# Altium PCB DPT2.0.PcbDoc (part 1 of 2)
Units mm, origin at the board's own origin, x right, y up, seen from the top; angles counter-clockwise.
Board outline 109.22 x 132.08 mm, 4 copper layers (Top Layer, Layer 1, Layer 2, Bottom Layer), stack 1.491 mm thick; 260 components, 74 nets, 572 pads, 330 vias.
Unrouted connection lines stored in the file: 54.
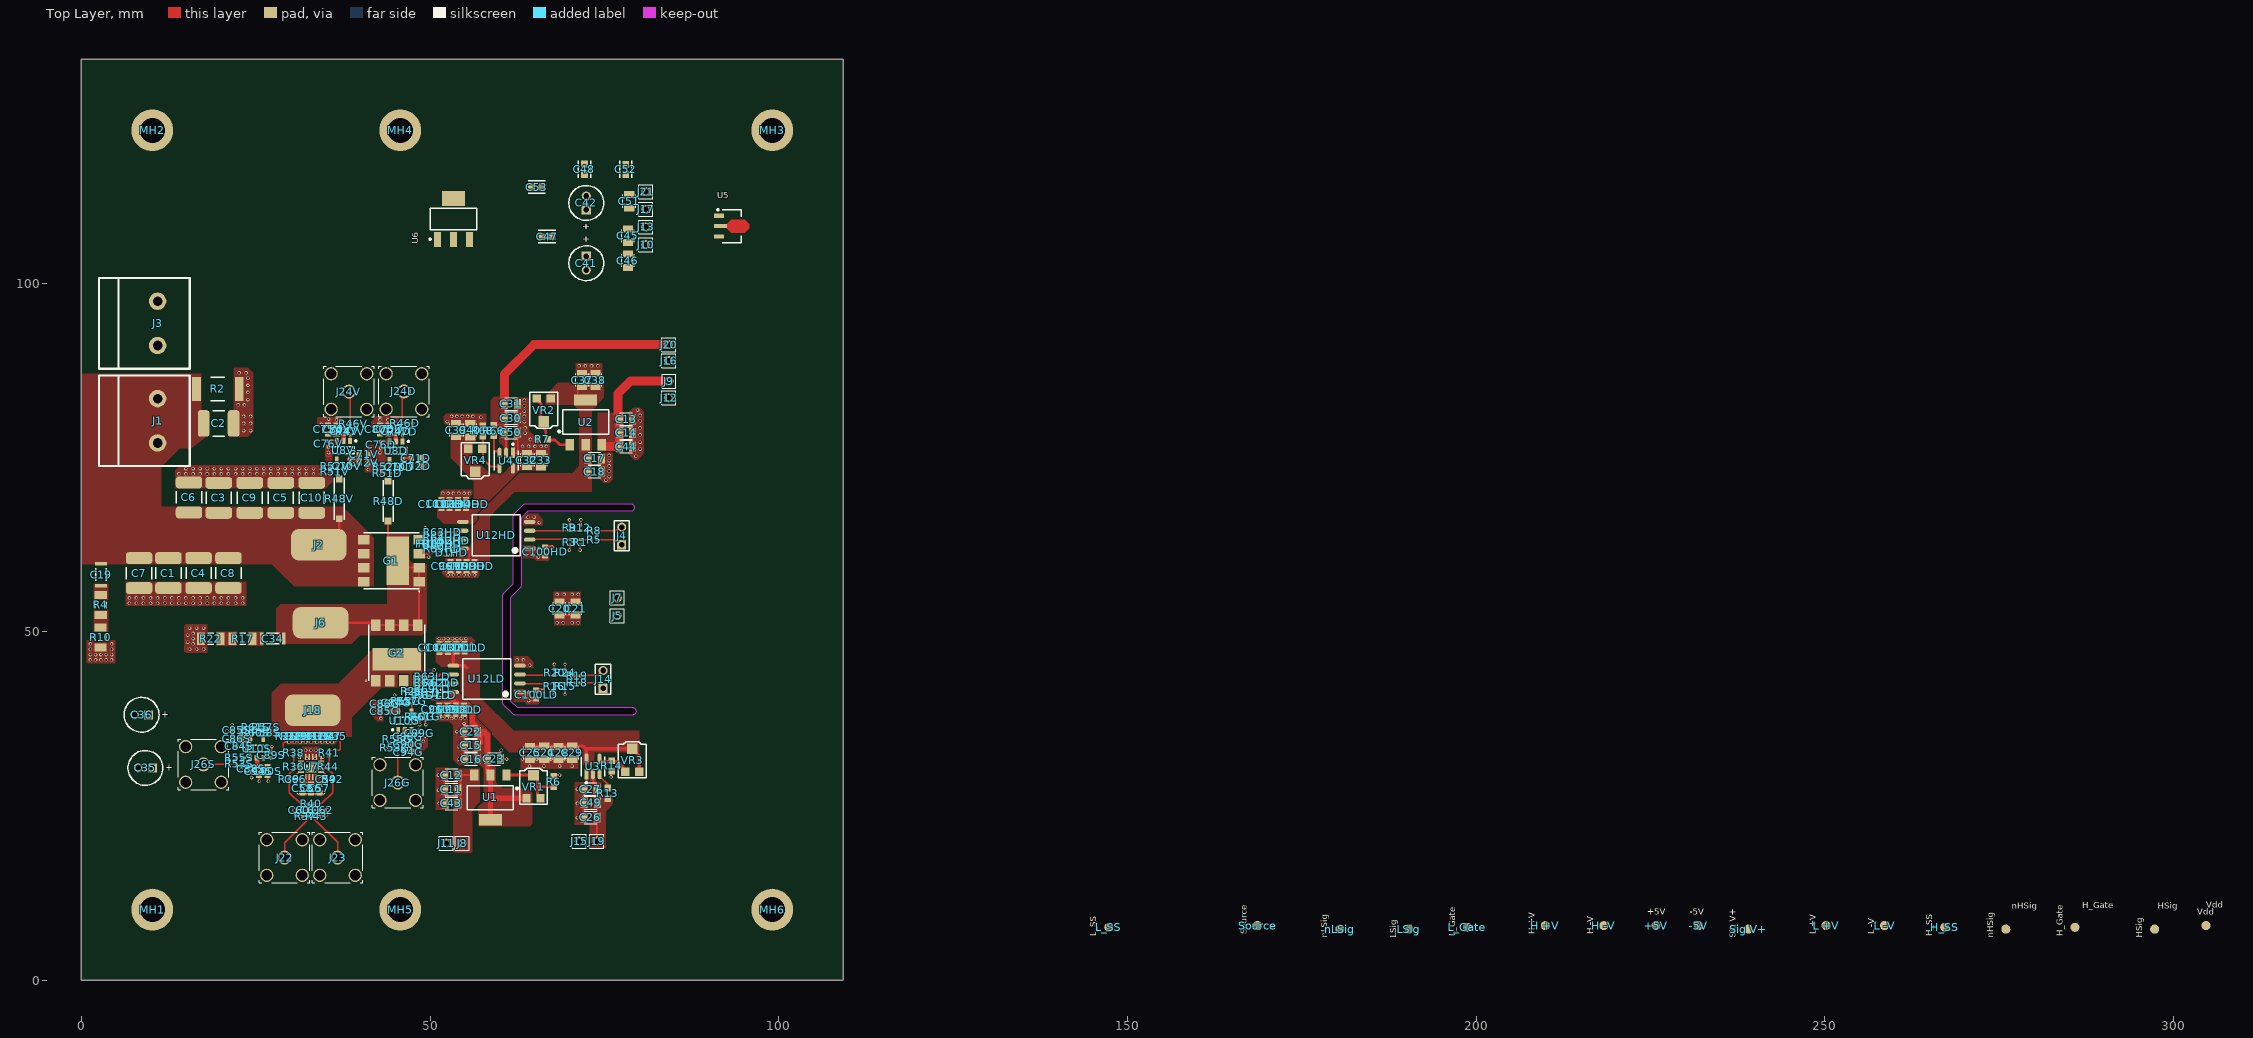
[diagram p0: Top Layer view]
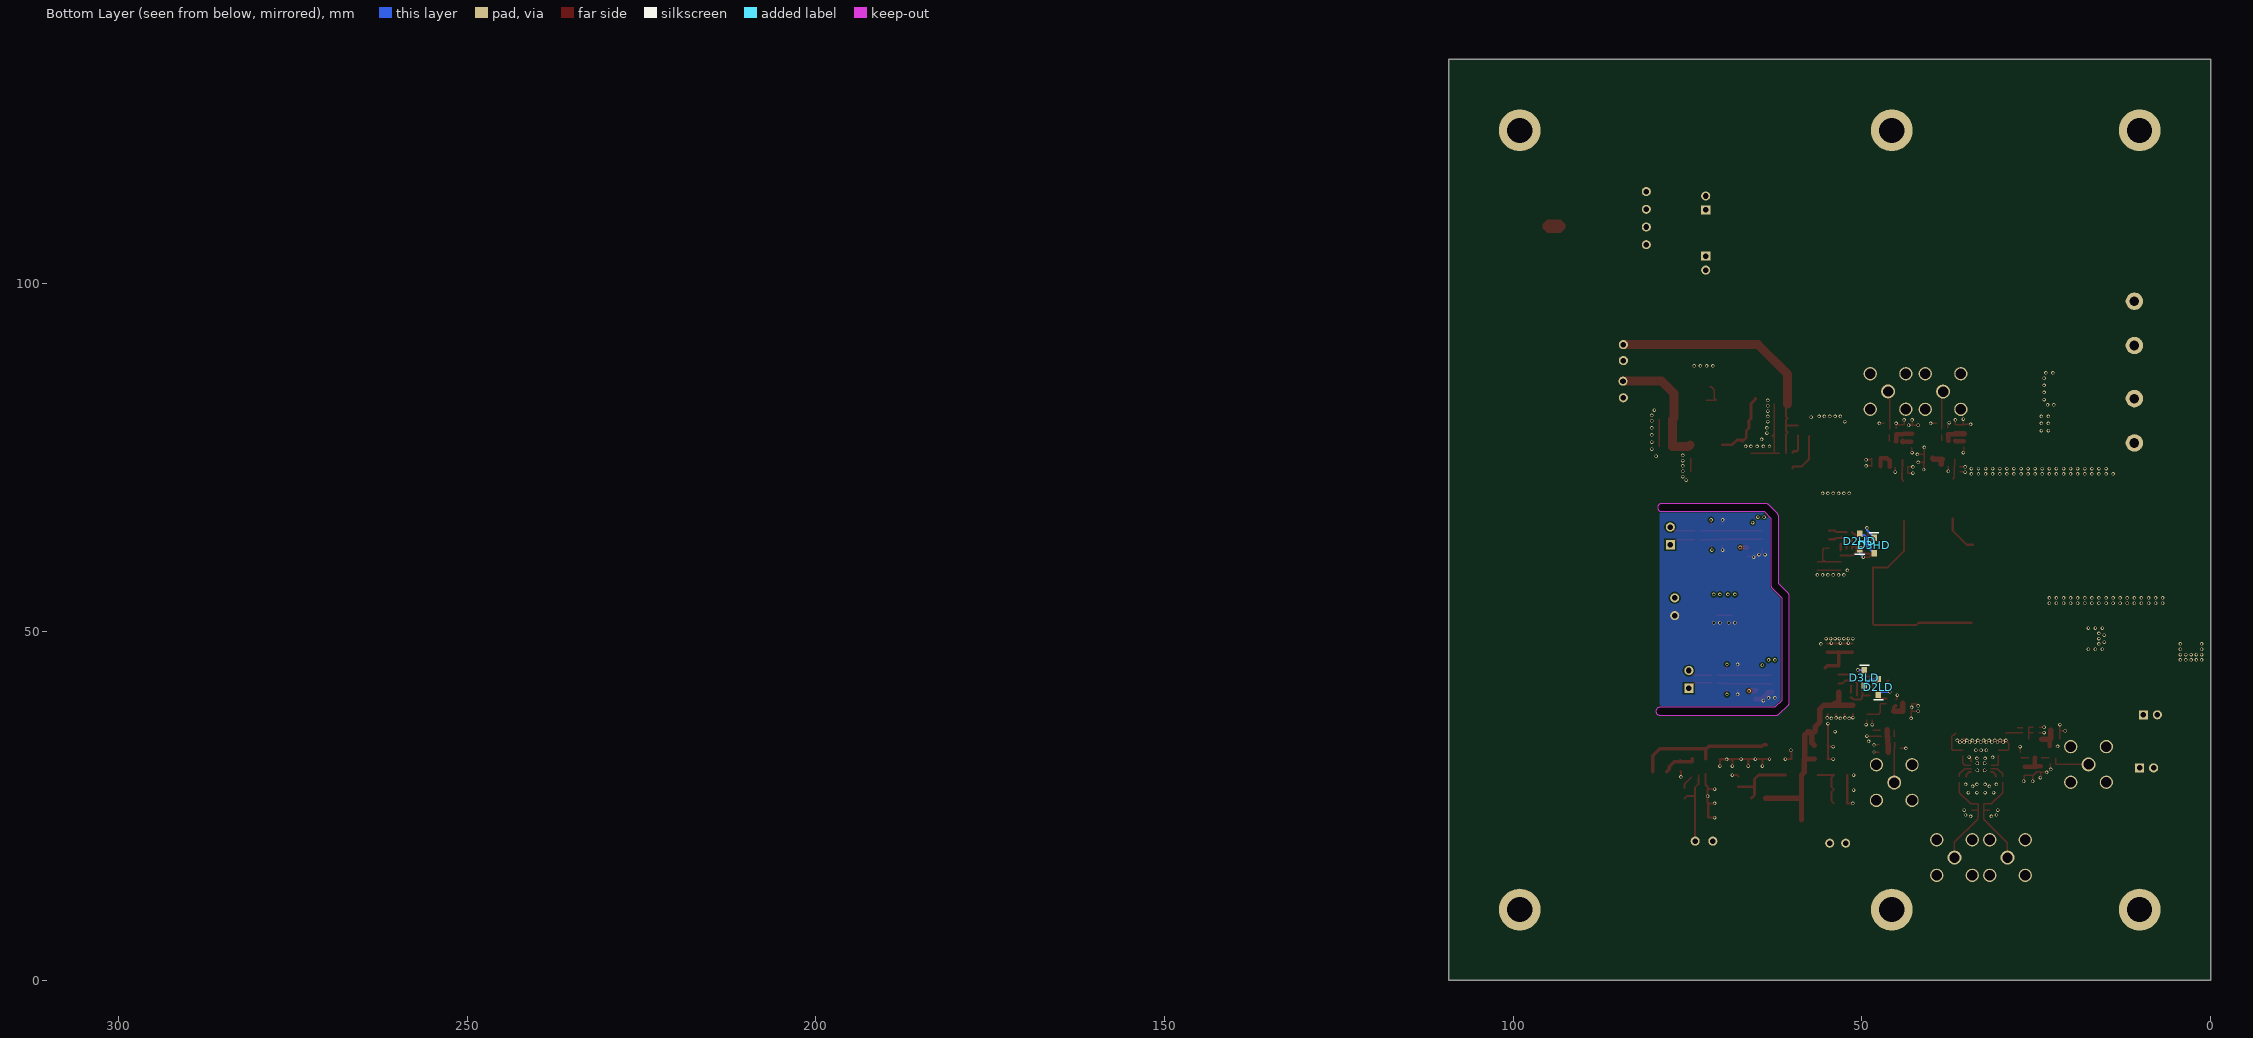
[diagram p1: Bottom Layer view, seen from below]
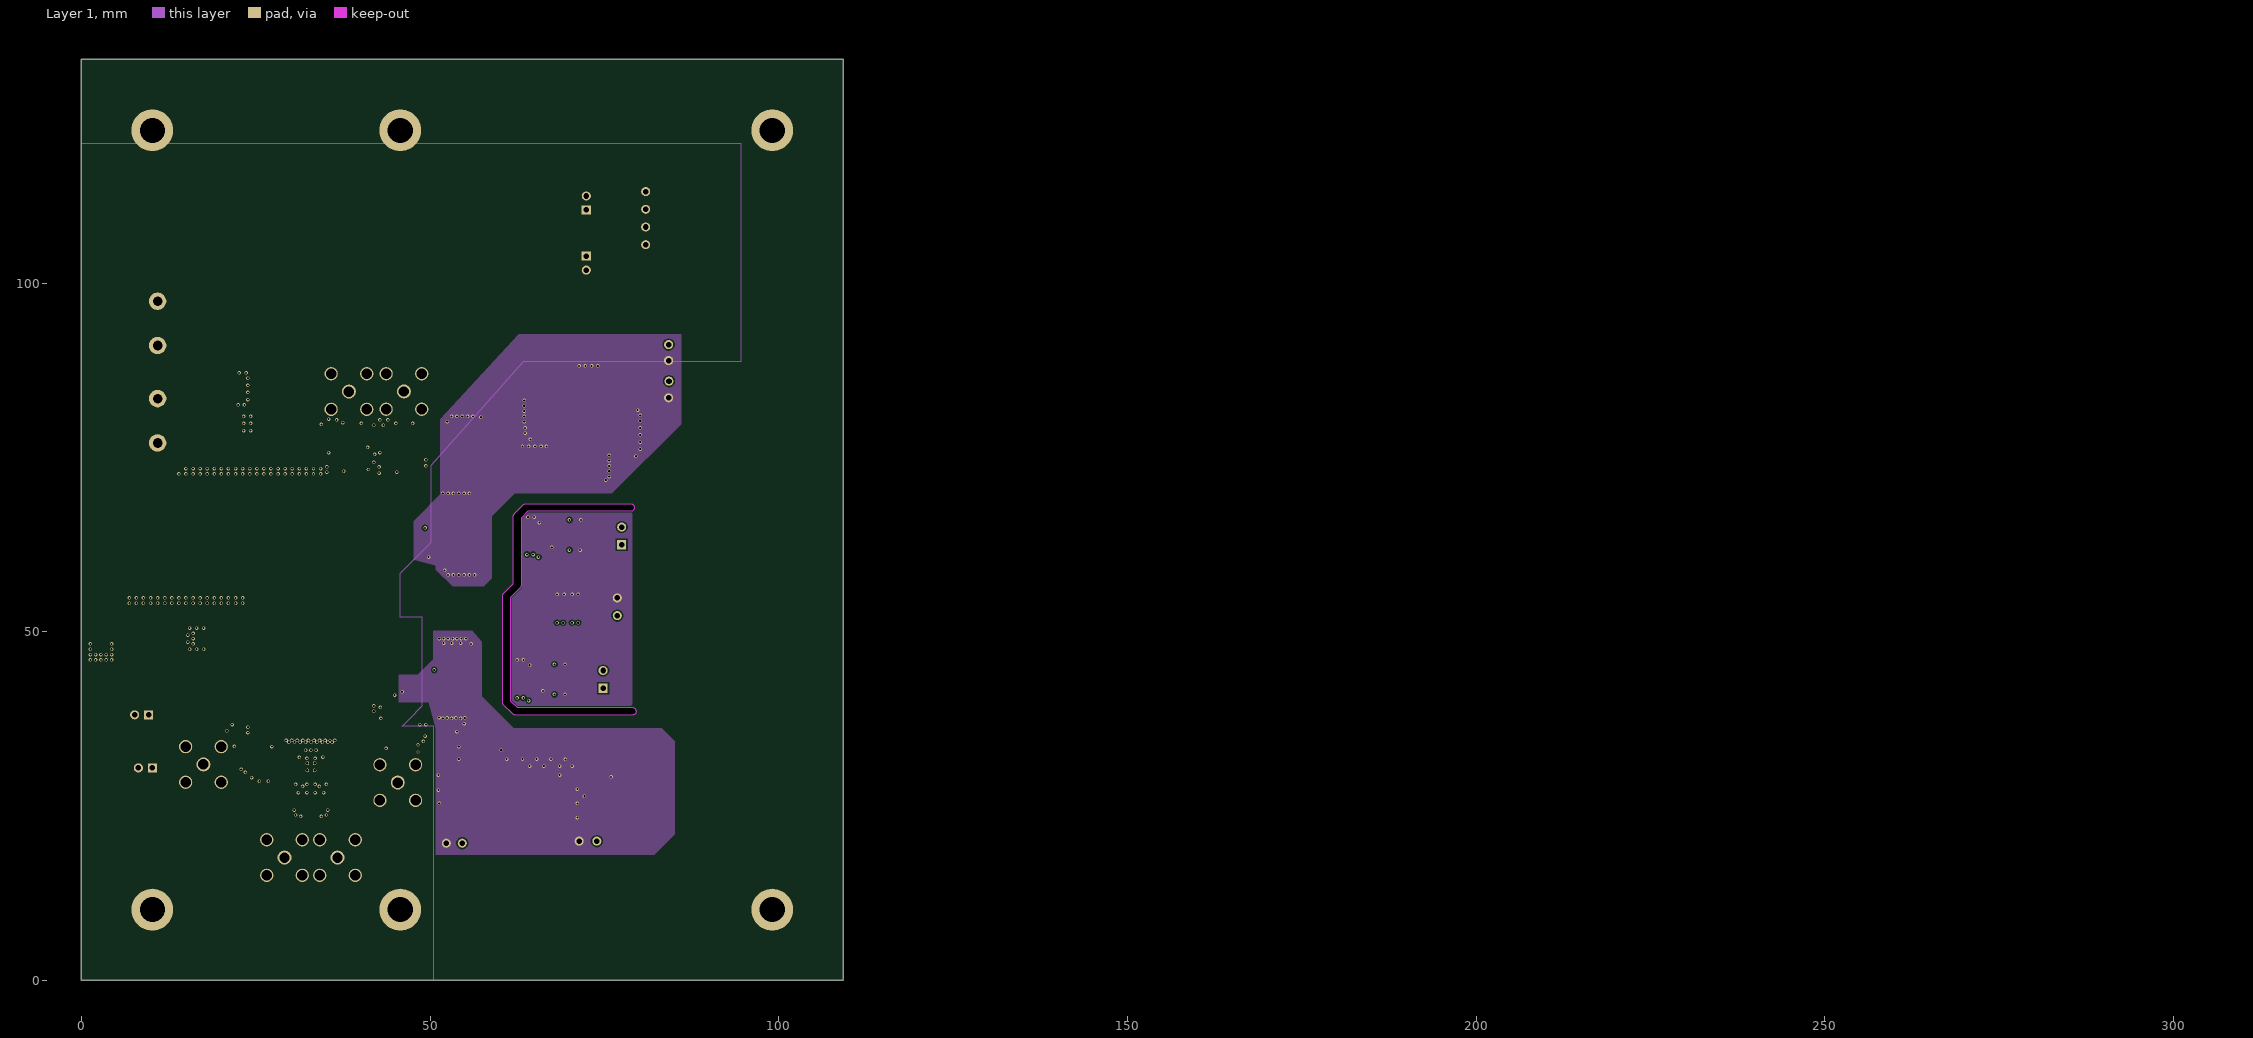
[diagram p2: Layer 1]
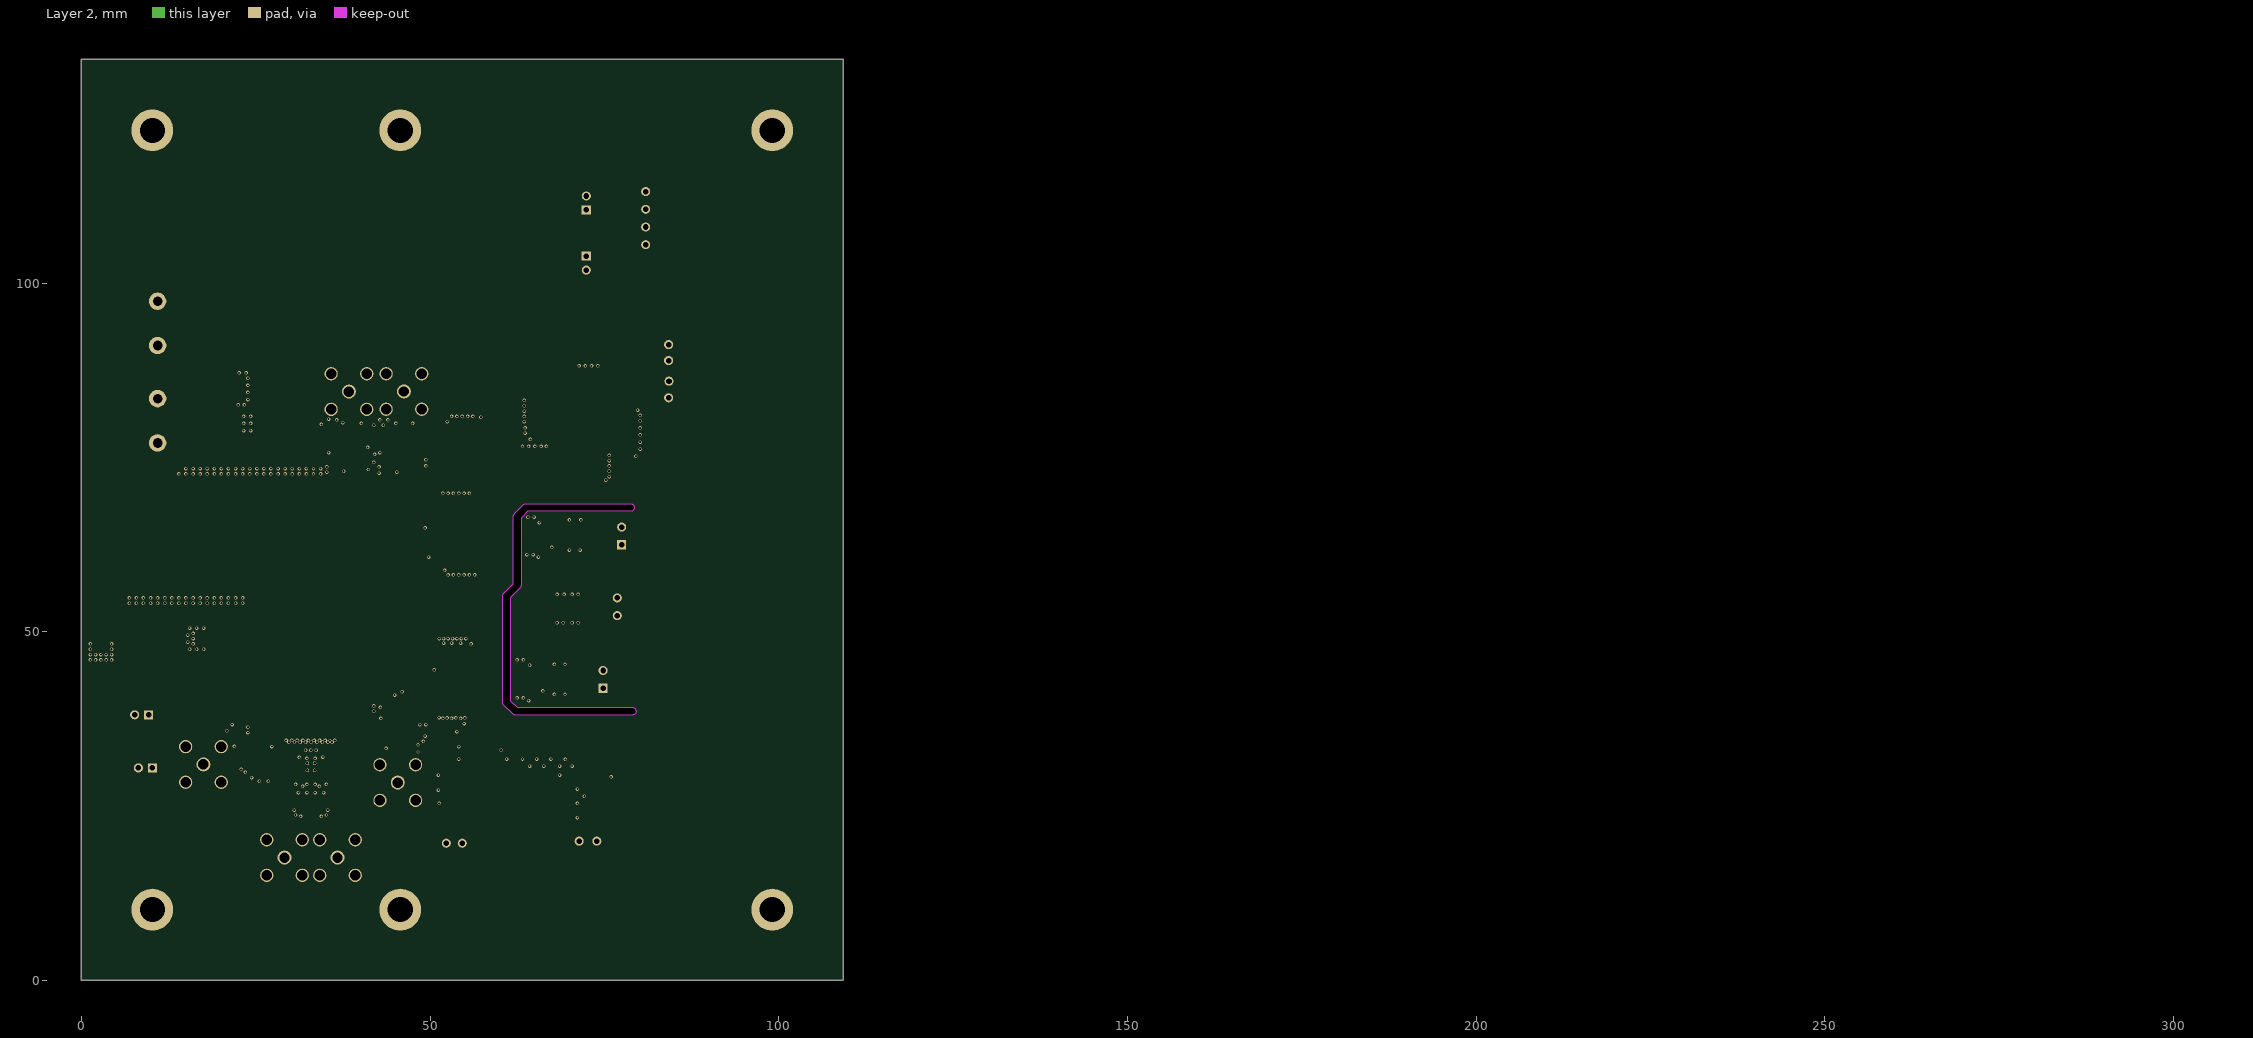
[diagram p3: Layer 2]
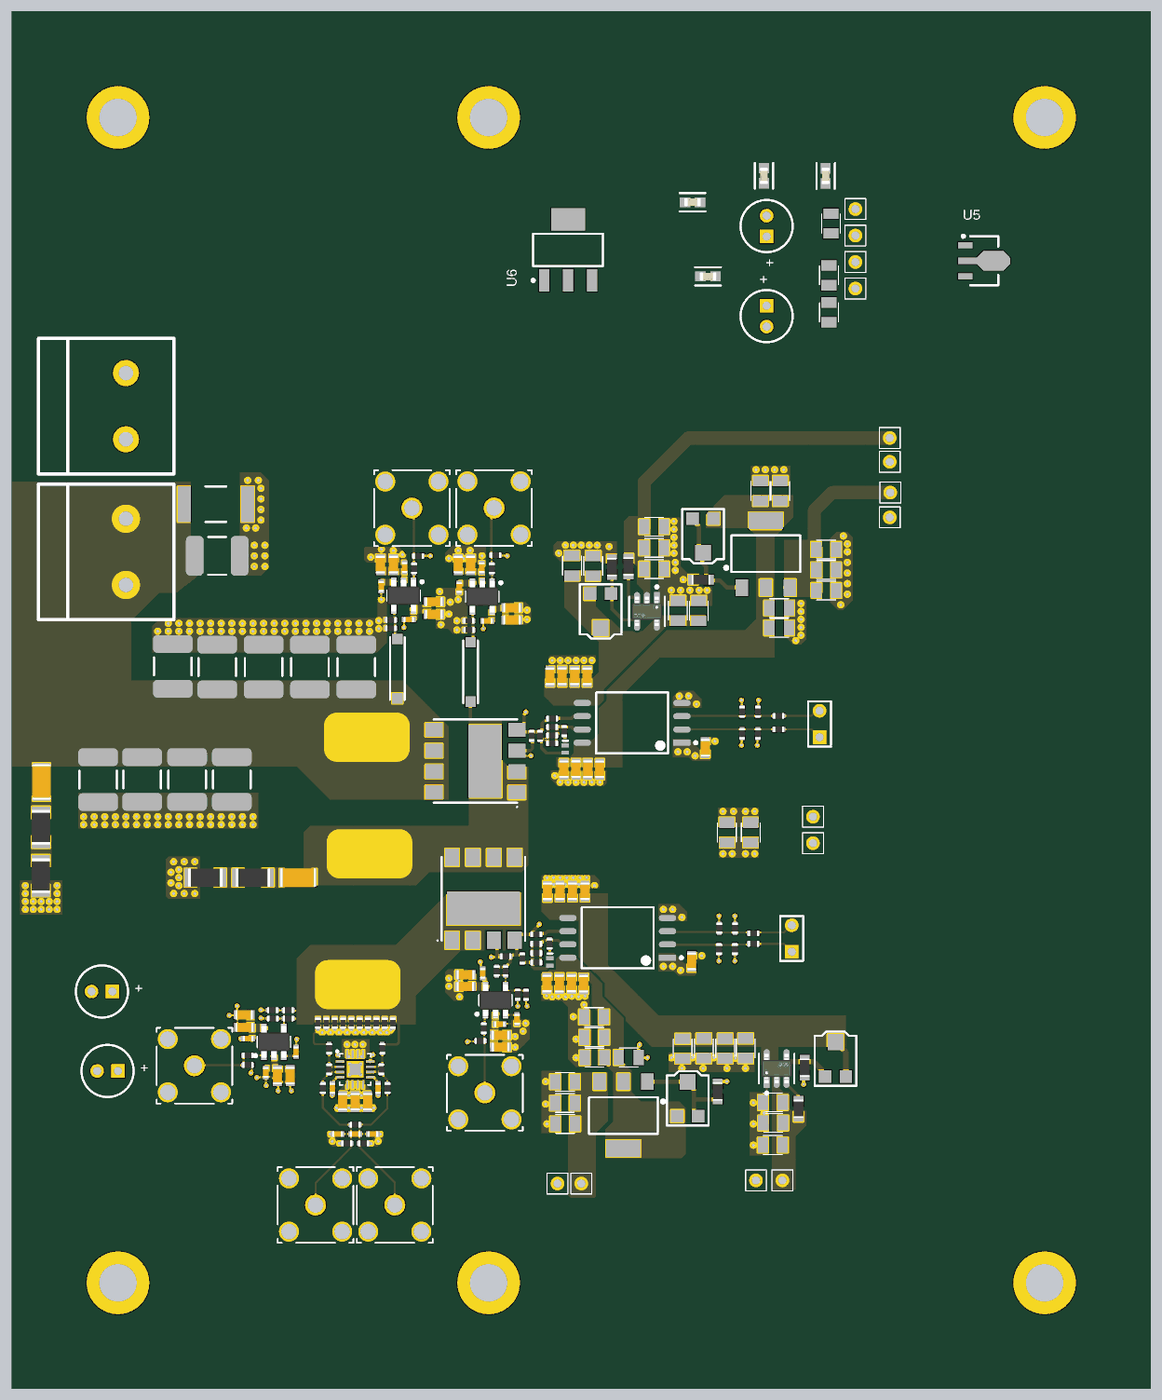
[diagram p5: 3D render of the assembled board from above, using the file's embedded part models]

## Layer stack, top to bottom
Top Solder: solder mask 0.0102, Solder Resist, Dk 3.5
Top Layer: signal copper 0.0356
Dielectric 2: prepreg 0.11, PP-006, Dk 4.1
Layer 1: signal copper 0.035
Dielectric 1: dielectric 1.13, FR-4, Dk 4.8
Layer 2: signal copper 0.035
Dielectric 3: prepreg 0.11, PP-006, Dk 4.1
Bottom Layer: signal copper 0.0356
Bottom Solder: solder mask 0.0102, Solder Resist, Dk 3.5

## Board outline
0,0 109.22,0 109.22,132.08 0,132.08
cut-out: 60.572,39.488 cw(c60.96,39.878) 60.41,39.878 60.41,55.118 cw(c60.96,55.118) 60.572,55.508 60.571,55.507 61.934,56.87 61.934,66.548 cw(c62.484,66.548) 62.096,66.938 62.095,66.937 63.365,68.207 63.364,68.206 cw(c63.754,67.818) 63.754,68.368 78.74,68.368 cw(c78.74,67.818) 79.29,67.818 cw(c78.74,67.818) 78.74,67.268 63.982,67.268 63.034,66.32 63.034,56.642 cw(c62.484,56.642) 62.872,56.252 62.873,56.253 61.51,54.89 61.51,40.106 62.458,39.158 78.994,39.158 cw(c78.994,38.608) 79.544,38.608 cw(c78.994,38.608) 78.994,38.058 62.23,38.058 cw(c62.23,38.608) 61.84,38.22 61.841,38.219

## Design rules (kind name [scope] priority, off if disabled: settings)
Clearance [All] p1: gap=0.2 ignorepadtopadclearanceinfootprint=TRUE
ComponentClearance [All] p1: gap=0.2 collisioncheckmode=3 verticalgap=0.254 showdistances=FALSE
DiffPairsRouting [All] p1: maxlimit=0.4 minlimit=0.2 mostfreqgap=0.254 toplayer_minwidth=0.15 toplayer_maxwidth=0.381 toplayer_prefwidth=0.381 midlayer1_minwidth=0.15 midlayer1_maxwidth=0.381 midlayer1_prefwidth=0.381 midlayer2_minwidth=0.15 midlayer2_maxwidth=0.381 midlayer2_prefwidth=0.381 bottomlayer_minwidth=0.15 bottomlayer_maxwidth=0.381 bottomlayer_prefwidth=0.381 maxuncoupledlength=12.7
HoleSize [All] p1: absolutevalues=TRUE maxlimit=6 minlimit=0.3 maxpercent=80.000 minpercent=20.000
HoleToHoleClearance [All] p1: gap=0.41 allowstackedmicrovias=TRUE
MinimumAnnularRing [All] p1: minimumring=0.15
PlaneConnect [All] p1: planeconnectstyle=Direct reliefexpansion=0.508 reliefentries=4 reliefconductorwidth=0.254 reliefairgap=0.254
PolygonConnect [All] p1: connectstyle=Direct reliefconductorwidth=0.254 reliefentries=4 polygonreliefangle="90 Angle" airgapwidth=0.254
RoutingVias [All] p1: holewidth=0.3 width=0.5 viastyle="Through Hole" minholewidth=0.3 minwidth=0.5 maxholewidth=6 maxwidth=1.27
SolderMaskExpansion [All] p1: expansion=0.102 istentingtop=FALSE
UnRoutedNet [All] p1: checkbadconnections=TRUE
Width [All] p1: maxlimit=10 minlimit=0.15 preferedwidth=0.185
24 further rules are at their usual default settings.

## Classes and differential pairs
channel class GateDriver: HD LD
component class LD: C96LD C97LD C98LD C99LD C100LD C101LD C102LD C103LD C104LD D1LD D2LD D3LD FB1LD R62LD R63LD R64LD R67LD R69LD U12LD
component class HD: C96HD C97HD C98HD C99HD C100HD C101HD C102HD C103HD C104HD D1HD D2HD D3HD FB1HD R62HD R63HD R64HD R67HD R69HD U12HD
channel class LV_Measurements: G S
channel class HV_Measurements: D V
component class V: C70V C71V C72V C74V C75V C76V C80V J24V R46V R47V R48V R51V R52V U8V
component class S: C84S C85S C86S C88S C89S C90S C94S J26S R53S R55S R57S R58S R60S R61S U10S
component class G: C84G C85G C86G C88G C89G C90G C94G J26G R53G R55G R57G R58G R60G R61G U10G
component class D: C70D C71D C72D C74D C75D C76D C80D J24D R46D R47D R48D R51D R52D U8D
component class DPT2.0: *1 *2 +5V -5V C1 C2 C3 C4 C5 C6 C7 C8 C9 C10 C11 C12 C13 C14 C15 C16 C17 C18 C19 C20 C21 C22 C23 C24 C25 C26 C27 C28 C29 C30 C31 C32 C33 C34 C35 C36 C37 C38 C39 C40 C41 C42 C43 C44 C45 C46 C47 C48 C49 C50 C51 C52 C53 C56 C57 C58 C59 C60 C61 C62 C66 G1 G2 "H +V" "H -V" H_Gate H_SS HSig J1 J2 J3 J4 J5 J6 J7 J8 J9 J10 J11 J12 J13 J14 J15 J16 J17 J18 J19 J20 J21 J22 J23 "L +V" "L -V" L_Gate L_SS LSig MH1 MH2 MH3 MH4 MH5 MH6 nHSig nLSig R1 R2 R3 R4 R5 R6 R7 R8 R9 R10 R11 R12 R13 R14 R15 R16 R17 R18 R19 R20 R21 R22 R24 R26 R27 R28 R29 R30 R31 R32 R33 R34 R35 R36 R37 R38 R39 R40 R41 R42 R43 R44 R66 R68 "Sig V+" Source U1 U2 U3 U4 U5 U6 U7 Vdd VR1 VR2 VR3 VR4

## Components (designator, comment, footprint, x,y, rotation, side; value= is the part's Value field where it differs from the comment)
+5V "Testpoint" Testpoint-Footprint-1 225.806,7.874 r0 top
-5V "Testpoint" Testpoint-Footprint-1 231.902,7.874 r0 top
C1 "CAP-1812" CAP_1812 12.475,58.431 r270 top value=0.1u
C2 "CAP-1812" CAP_1812 19.676,79.883 r0 top value=0.1u
C3 "CAP-1812" CAP_1812 19.685,69.215 r90 top value=0.1u
C4 "CAP-1812" CAP_1812 16.793,58.431 r270 top value=0.1u
C5 "CAP-1812" CAP_1812 28.575,69.215 r90 top value=0.1u
C6 "CAP-1812" CAP_1812 15.418,69.285 r90 top value=0.1u
C7 "CAP-1812" CAP_1812 8.255,58.42 r270 top value=0.1u
C8 "CAP-1812" CAP_1812 21.082,58.431 r270 top value=0.1u
C9 "CAP-1812" CAP_1812 24.13,69.215 r90 top value=0.1u
C10 "CAP-1812" CAP_1812 33.02,69.215 r90 top value=0.1u
C11 "CAP-0805" CAP_0805_MED 53.044,27.4 r180 top value=1u
C12 "CAP-0805" CAP_0805_MED 53.045,29.439 r180 top value=1u
C13 "CAP-0805" CAP_0805_MED 78.105,80.493 r0 top value=1u
C14 "CAP-0805" CAP_0805_MED 78.105,78.537 r0 top value=1u
C15 "CAP-0805" CAP_0805_MED 55.855,33.706 r180 top value=1u
C16 "CAP-0805" CAP_0805_MED 55.88,31.75 r180 top value=1u
C17 "CAP-0805" CAP_0805_MED 73.596,74.875 r0 top value=1u
C18 "CAP-0805" CAP_0805_MED 73.596,72.977 r0 top value=1u
C19 "CAP-1206-HV" CAP_1206_HV 2.819,58.191 r90 top value=10p
C20 "CAP-0805" CAP_0805_MED 68.58,53.34 r90 top value=1u
C21 "CAP-0805" CAP_0805_MED 70.866,53.34 r90 top value=1u
C22 "CAP-0805" CAP_0805_MED 55.833,35.656 r180 top value=1u
C23 "CAP-0805" CAP_0805_MED 59.157,31.775 r0 top value=1u
C24 "CAP-0805" CAP_0805_MED 66.37,32.649 r270 top value=1u
C25 "CAP-0805" CAP_0805_MED 64.338,32.624 r270 top value=1u
C26 "CAP-0805" CAP_0805_MED 72.983,23.378 r180 top value=1u
C27 "CAP-0805" CAP_0805_MED 72.995,27.457 r180 top value=1u
C28 "CAP-0805" CAP_0805_MED 68.412,32.639 r270 top value=1u
C29 "CAP-0805" CAP_0805_MED 70.378,32.65 r270 top value=1u
C30 "CAP-0805" CAP_0805_MED 61.595,80.645 r0 top value=1u
C31 "CAP-0805" CAP_0805_MED 61.595,82.677 r0 top value=1u
C32 "CAP-0805" CAP_0805_MED 63.881,74.625 r90 top value=1u
C33 "CAP-0805" CAP_0805_MED 65.873,74.61 r90 top value=1u
C34 "CAP-1206-HV" CAP_1206_HV 27.432,49.022 r180 top value=10p
C35 "PCAP-2MMx5MM" PCAP_2MM_5MM 9.16,30.48 r180 top value=100u
C36 "PCAP-2MMx5MM" PCAP_2MM_5MM 8.62,38.1 r180 top value=100u
C37 "CAP-0805" CAP_0805_MED 71.801,86.104 r90 top value=1u
C38 "CAP-0805" CAP_0805_MED 73.706,86.104 r90 top value=1u
C39 "CAP-0805" CAP_0805_MED 53.72,78.939 r90 top value=1u
C40 "CAP-0805" CAP_0805_MED 55.753,78.918 r90 top value=1u
C41 "PCAP-2MMx5MM" PCAP_2MM_5MM 72.39,102.87 r270 top value=100u
C42 "PCAP-2MMx5MM" PCAP_2MM_5MM 72.39,111.506 r90 top value=100u
C43 "CAP-0805" CAP_0805_MED 53.063,25.4 r180 top value=1u
C44 "CAP-0805" CAP_0805_MED 78.105,76.556 r0 top value=1u
C45 "CAP-0805" CAP_0805_MED 78.368,106.786 r90 top value=1u
C46 "CAP-0805" CAP_0805_MED 78.368,103.23 r270 top value=1u
C47 "C0603C104K5RACTU" FP-C0603C-CF-IPC_B 66.766,106.68 r180 top value="0.10 μF"
C48 "C0603C104K5RACTU" FP-C0603C-CF-IPC_B 72.136,116.332 r90 top value="0.10 μF"
C49 "CAP-0805" CAP_0805_MED 73.022,25.491 r0 top value=1u
C50 "CAP-0805" CAP_0805_MED 61.595,78.613 r180 top value=1u
C51 "CAP-0805" CAP_0805_MED 78.557,111.749 r90 top value=1u
C52 "C0603C104K5RACTU" FP-C0603C-CF-IPC_B 78.051,116.321 r270 top value="0.10 μF"
C53 "C0603C104K5RACTU" FP-C0603C-CF-IPC_B 65.278,113.792 r0 top value="0.10 μF"
C56 "CAP-0603" CAP_0603_HIGH 32.917,27.532 r90 top value=1u
C57 "CAP-0603" CAP_0603_HIGH 34.117,27.532 r90 top value=1u
C58 "CAP-0603" CAP_0603_HIGH 31.717,27.532 r90 top value=1u
C59 "CAP-0402" CAP_0402_HIGH 35.117,28.832 r90 top value=1u
C60 "CAP-0402" CAP_0402_HIGH 31.217,24.432 r0 top value=1u
C61 "CAP-0402" CAP_0402_HIGH 32.917,24.432 r0 top value=1u
C62 "CAP-0402" CAP_0402_HIGH 34.617,24.432 r0 top value=1u
C66 "CAP-0402" CAP_0402_HIGH 30.717,28.832 r90 top value=1u
C70D "CAP-0402" CAP_0402_HIGH 45.593,73.635 r180 top value=1u (schematic designator C70)
C70V "CAP-0402" CAP_0402_HIGH 38.062,73.77 r180 top value=1u (schematic designator C70)
C71D "CAP-0603" CAP_0603_HIGH 47.955,74.905 r0 top value=1u (schematic designator C71)
C71V "CAP-0603" CAP_0603_HIGH 40.462,75.47 r0 top value=1u (schematic designator C71)
C72D "CAP-0603" CAP_0603_HIGH 47.955,73.73 r0 top value=1u (schematic designator C72)
C72V "CAP-0603" CAP_0603_HIGH 40.462,74.27 r0 top value=1u (schematic designator C72)
C74D "CAP-0402" CAP_0402_HIGH 45.06,78.74 r90 top value=1u (schematic designator C74)
C74V "CAP-0402" CAP_0402_HIGH 37.662,78.77 r90 top value=1u (schematic designator C74)
C75D "CAP-0603" CAP_0603_HIGH 43.993,79.045 r90 top value=1u (schematic designator C75)
C75V "CAP-0603" CAP_0603_HIGH 35.331,79.045 r90 top value=1u (schematic designator C75)
C76D "CAP-0402" CAP_0402_HIGH 42.901,76.835 r90 top value=1u (schematic designator C76)
C76V "CAP-0402" CAP_0402_HIGH 35.408,76.937 r90 top value=1u (schematic designator C76)
C80D "CAP-0603" CAP_0603_HIGH 42.799,79.045 r90 top value=1u (schematic designator C80)
C80V "CAP-0603" CAP_0603_HIGH 36.601,79.045 r90 top value=1u (schematic designator C80)
C84G "CAP-0402" CAP_0402_HIGH 45.144,39.841 r90 top value=1u (schematic designator C84)
C84S "CAP-0402" CAP_0402_HIGH 22.642,33.58 r180 top value=1u (schematic designator C84)
C85G "CAP-0603" CAP_0603_HIGH 43.484,38.576 r180 top value=1u (schematic designator C85)
C85S "CAP-0603" CAP_0603_HIGH 22.258,35.864 r180 top value=1u (schematic designator C85)
C86G "CAP-0603" CAP_0603_HIGH 43.506,39.717 r180 top value=1u (schematic designator C86)
C86S "CAP-0603" CAP_0603_HIGH 22.29,34.674 r180 top value=1u (schematic designator C86)
C88G "CAP-0402" CAP_0402_HIGH 46.78,34.962 r0 top value=1u (schematic designator C88)
C88S "CAP-0402" CAP_0402_HIGH 24.348,30.336 r270 top value=1u (schematic designator C88)
C89G "CAP-0402" CAP_0402_HIGH 48.442,35.443 r270 top value=1u (schematic designator C89)
C89S "CAP-0402" CAP_0402_HIGH 27.233,32.318 r90 top value=1u (schematic designator C89)
C90G "CAP-0603" CAP_0603_HIGH 46.863,33.909 r0 top value=1u (schematic designator C90)
C90S "CAP-0603" CAP_0603_HIGH 26.68,30.04 r270 top value=1u (schematic designator C90)
C94G "CAP-0603" CAP_0603_HIGH 46.863,32.766 r0 top value=1u (schematic designator C94)
C94S "CAP-0603" CAP_0603_HIGH 25.455,30.032 r270 top value=1u (schematic designator C94)
C96HD "CAP-0603" CAP_0603_HIGH 52.937,59.421 r90 top value=1u (schematic designator C96)
C96LD "CAP-0603" CAP_0603_HIGH 51.308,38.862 r90 top value=1u (schematic designator C96)
C97HD "CAP-0603" CAP_0603_HIGH 54.102,59.436 r90 top value=1u (schematic designator C97)
C97LD "CAP-0603" CAP_0603_HIGH 52.512,38.856 r90 top value=1u (schematic designator C97)
C98HD "CAP-0603" CAP_0603_HIGH 55.228,59.425 r90 top value=1u (schematic designator C98)
C98LD "CAP-0603" CAP_0603_HIGH 54.838,38.846 r90 top value=1u (schematic designator C98)
C99HD "CAP-0603" CAP_0603_HIGH 56.384,59.416 r90 top value=1u (schematic designator C99)
C99LD "CAP-0603" CAP_0603_HIGH 53.678,38.859 r90 top value=1u (schematic designator C99)
C100HD "CAP-0603" CAP_0603_HIGH 66.5,61.491 r90 top value=1u (schematic designator C100)
C100LD "CAP-0603" CAP_0603_HIGH 65.202,40.996 r90 top value=1u (schematic designator C100)
C101HD "CAP-0603" CAP_0603_HIGH 51.606,68.321 r90 top value=1u (schematic designator C101)
C101LD "CAP-0603" CAP_0603_HIGH 54.964,47.716 r90 top value=1u (schematic designator C101)
C102HD "CAP-0603" CAP_0603_HIGH 52.774,68.334 r90 top value=1u (schematic designator C102)
C102LD "CAP-0603" CAP_0603_HIGH 53.767,47.716 r90 top value=1u (schematic designator C102)
C103HD "CAP-0603" CAP_0603_HIGH 53.975,68.326 r90 top value=1u (schematic designator C103)
C103LD "CAP-0603" CAP_0603_HIGH 52.558,47.713 r90 top value=1u (schematic designator C103)
C104HD "CAP-0603" CAP_0603_HIGH 55.164,68.321 r90 top value=1u (schematic designator C104)
C104LD "CAP-0603" CAP_0603_HIGH 51.359,47.701 r90 top value=1u (schematic designator C104)
D1HD "CDBQC0130L-HF" DIO_SOD-923F 53.08,61.354 r270 top (schematic designator D1)
D1LD "CDBQC0130L-HF" DIO_SOD-923F 51.605,40.926 r270 top (schematic designator D1)
D2HD "DIO_323F_ZENER" DIO_SOD-323F 50.298,62.955 r90 bottom value=6.2V (schematic designator D2)
D2LD "DIO_323F_ZENER" DIO_SOD-323F 47.625,42.08 r90 bottom value=6.2V (schematic designator D2)
D3HD "DIO_323F_ZENER" DIO_SOD-323F 48.253,62.388 r270 bottom value=6.2V (schematic designator D3)
D3LD "DIO_323F_ZENER" DIO_SOD-323F 49.632,43.409 r270 bottom value=6.2V (schematic designator D3)
FB1HD "RES-0402" RES_0402_HIGH 50.657,62.606 r90 top value=1k (schematic designator FB1)
FB1LD "RES-0402" RES_0402_HIGH 48.946,41.275 r90 top value=1k (schematic designator FB1)
G1 "GPI65030DFN" DFN_8X8 44.45,60.198 r180 top
G2 "GPI65030DFN" DFN_8X8 45.212,46.99 r90 top
"H +V" "Testpoint" Testpoint-Footprint-1 209.931,7.874 r90 top
"H -V" "Testpoint" Testpoint-Footprint-1 218.313,7.874 r90 top
H_Gate "Testpoint" Testpoint-Footprint-1 285.877,7.62 r90 top
H_SS "Testpoint" Testpoint-Footprint-1 267.208,7.62 r90 top
HSig "Testpoint" Testpoint-Footprint-1 297.307,7.366 r90 top
J1 "TERM_1X2" J_TERM_BLK_1X2 10.922,80.264 r270 top
J2 "CONN_PAD" CONN_PAD 34.036,62.484 r0 top
J3 "TERM_1X2" J_TERM_BLK_1X2 10.922,94.234 r270 top
J4 "PIN_M_1X2" J_THT_2.54MM_1X2 77.47,65.024 r90 top
J5 "PIN_M" J_THT_1_PIN 76.835,52.324 r180 top
J6 "CONN_PAD" CONN_PAD 34.29,51.308 r180 top
J7 "PIN_M" J_THT_1_PIN 76.835,54.864 r180 top
J8 "PIN_M" J_THT_1_PIN 54.61,19.685 r90 top
J9 "PIN_M" J_THT_1_PIN 84.254,85.946 r180 top
J10 "PIN_M" J_THT_1_PIN 80.908,105.516 r90 top
J11 "PIN_M" J_THT_1_PIN 52.324,19.685 r90 top
J12 "PIN_M" J_THT_1_PIN 84.201,83.566 r180 top
J13 "PIN_M" J_THT_1_PIN 80.908,108.056 r270 top
J14 "PIN_M_1X2" J_THT_2.54MM_1X2 74.803,44.45 r90 top
J15 "PIN_M" J_THT_1_PIN 71.369,19.985 r180 top
J16 "PIN_M" J_THT_1_PIN 84.201,88.9 r90 top
J17 "PIN_M" J_THT_1_PIN 80.908,110.596 r90 top
J18 "CONN_PAD" CONN_PAD 33.171,38.76 r180 top
J19 "PIN_M" J_THT_1_PIN 73.909,19.985 r180 top
J20 "PIN_M" J_THT_1_PIN 84.201,91.186 r90 top
J21 "PIN_M" J_THT_1_PIN 80.908,113.136 r270 top
J22 "SMA_VERT_F" SMA_VERT_F 29.117,17.624 r0 top
J23 "SMA_VERT_F" SMA_VERT_F 36.717,17.624 r0 top
J24D "SMA_VERT_F" SMA_VERT_F 46.241,84.468 r0 top (schematic designator J24)
J24V "SMA_VERT_F" SMA_VERT_F 38.354,84.455 r180 top (schematic designator J24)
J26G "SMA_VERT_F" SMA_VERT_F 45.358,28.383 r90 top (schematic designator J26)
J26S "SMA_VERT_F" SMA_VERT_F 17.49,30.984 r0 top (schematic designator J26)
"L +V" "Testpoint" Testpoint-Footprint-1 250.19,7.874 r90 top
"L -V" "Testpoint" Testpoint-Footprint-1 258.572,7.874 r90 top
L_Gate "Testpoint" Testpoint-Footprint-1 198.755,7.62 r90 top
L_SS "Testpoint" Testpoint-Footprint-1 147.32,7.62 r90 top
LSig "Testpoint" Testpoint-Footprint-1 190.373,7.366 r90 top
MH1 "Mounting Hole" "Mounting Hole-Footprint-1" 10.16,10.16 r0 top
MH2 "Mounting Hole" "Mounting Hole-Footprint-1" 10.16,121.92 r0 top
MH3 "Mounting Hole" "Mounting Hole-Footprint-1" 99.06,121.92 r0 top
MH4 "Mounting Hole" "Mounting Hole-Footprint-1" 45.72,121.92 r0 top
MH5 "Mounting Hole" "Mounting Hole-Footprint-1" 45.72,10.16 r0 top
MH6 "Mounting Hole" "Mounting Hole-Footprint-1" 99.06,10.16 r0 top
nHSig "Testpoint" Testpoint-Footprint-1 275.971,7.366 r90 top
nLSig "Testpoint" Testpoint-Footprint-1 180.467,7.366 r90 top
R1 "RES-0402" RES_0402_HIGH 71.544,62.828 r90 top value=1k
R2 "RES-2512" RES_2512_MED 19.558,84.836 r0 top value=1k
R3 "RES-0402" RES_0402_HIGH 70.044,62.828 r270 top value=1k
R4 "RES-1206" RES_1206_MED 2.769,53.848 r270 top value=1k
R5 "RES-0402" RES_0402_HIGH 73.544,63.228 r180 top value=1k
R6 "RES-0603" RES_0603_MED 67.701,28.524 r270 top value=1k
R7 "RES-0603" RES_0603_MED 66.091,77.597 r0 top value=1k
R8 "RES-0402" RES_0402_HIGH 73.544,64.528 r180 top value=1k
R9 "RES-0402" RES_0402_HIGH 70.044,64.928 r90 top value=1k
R10 "RES-1206" RES_1206_MED 2.743,49.2 r270 top value=1k
R11 "RES-0402" RES_0402_HIGH 49.853,62.607 r90 top value=1k
R12 "RES-0402" RES_0402_HIGH 71.544,64.928 r270 top value=1k
R13 "RES-0603" RES_0603_MED 75.448,26.848 r90 top value=1k
R14 "RES-0603" RES_0603_MED 76.032,30.785 r90 top value=1k
R15 "RES-0402" RES_0402_HIGH 69.342,42.164 r90 top value=1k
R16 "RES-0402" RES_0402_HIGH 67.818,42.164 r270 top value=1k
R17 "RES-1206" RES_1206_MED 23.114,49.022 r0 top value=1k
R18 "RES-0402" RES_0402_HIGH 71.12,42.672 r180 top value=1k
R19 "RES-0402" RES_0402_HIGH 71.12,43.688 r180 top value=1k
R20 "RES-0402" RES_0402_HIGH 67.85,44.162 r90 top value=1k
R21 "RES-0402" RES_0402_HIGH 47.378,41.466 r0 top value=1k
R22 "RES-1206" RES_1206_MED 18.542,49.022 r0 top value=1k
R24 "RES-0402" RES_0402_HIGH 69.35,44.162 r270 top value=1k
R26 "RES-0402" RES_0402_HIGH 29.349,35.058 r90 top value=1k
R27 "RES-0402" RES_0402_HIGH 35.749,35.058 r90 top value=1k
R28 "RES-0402" RES_0402_HIGH 30.149,35.058 r90 top value=1k
R29 "RES-0402" RES_0402_HIGH 30.949,35.058 r90 top value=1k
R30 "RES-0402" RES_0402_HIGH 31.749,35.058 r90 top value=1k
R31 "RES-0402" RES_0402_HIGH 32.549,35.058 r90 top value=1k
R32 "RES-0402" RES_0402_HIGH 33.349,35.058 r90 top value=1k
R33 "RES-0402" RES_0402_HIGH 34.149,35.058 r90 top value=1k
R34 "RES-0402" RES_0402_HIGH 34.949,35.058 r90 top value=1k
R35 "RES-0402" RES_0402_HIGH 36.549,35.058 r90 top value=1k
R36 "RES-0402" RES_0402_HIGH 30.417,30.632 r90 top value=1k
R37 "RES-0402" RES_0402_HIGH 32.117,23.532 r0 top value=1k
R38 "RES-0402" RES_0402_HIGH 30.417,32.632 r90 top value=1k
R39 "RES-0402" RES_0402_HIGH 29.817,28.832 r90 top value=1k
R40 "RES-0402" RES_0402_HIGH 32.917,25.332 r180 top value=1k
R41 "RES-0402" RES_0402_HIGH 35.517,32.632 r90 top value=1k
R42 "RES-0402" RES_0402_HIGH 36.017,28.832 r90 top value=1k
R43 "RES-0402" RES_0402_HIGH 33.717,23.532 r180 top value=1k
R44 "RES-0402" RES_0402_HIGH 35.417,30.632 r90 top value=1k
R46D "RES-0402" RES_0402_HIGH 46.38,79.934 r180 top value=1k (schematic designator R46)
R46V "RES-0402" RES_0402_HIGH 38.962,79.87 r180 top value=1k (schematic designator R46)
R47D "RES-0402" RES_0402_HIGH 46.025,78.664 r90 top value=1k (schematic designator R47)
R47V "RES-0402" RES_0402_HIGH 38.562,78.67 r90 top value=1k (schematic designator R47)
R48D "RES-2512-SIDE" RES_2512_SIDE 43.982,68.751 r90 top (schematic designator R48)
R48V "RES-2512-SIDE" RES_2512_SIDE 36.967,69.065 r90 top (schematic designator R48)
R51D "RES-0402" RES_0402_HIGH 43.83,72.772 r0 top value=1k (schematic designator R51)
R51V "RES-0402" RES_0402_HIGH 36.327,72.945 r0 top value=1k (schematic designator R51)
R52D "RES-0402" RES_0402_HIGH 43.815,73.66 r0 top value=1k (schematic designator R52)
R52V "RES-0402" RES_0402_HIGH 36.327,73.745 r0 top value=1k (schematic designator R52)
R53G "RES-0402" RES_0402_HIGH 44.914,33.364 r0 top value=1k (schematic designator R53)
R53S "RES-0402" RES_0402_HIGH 22.618,31.058 r180 top value=1k (schematic designator R53)
R55G "RES-0402" RES_0402_HIGH 45.255,34.566 r270 top value=1k (schematic designator R55)
R55S "RES-0402" RES_0402_HIGH 22.619,31.968 r180 top value=1k (schematic designator R55)
R57G "RES-0402" RES_0402_HIGH 47.36,40.058 r90 top value=1k (schematic designator R57)
R57S "RES-0402" RES_0402_HIGH 26.497,36.306 r0 top value=1k (schematic designator R57)
R58G "RES-0402" RES_0402_HIGH 46.493,40.053 r90 top value=1k (schematic designator R58)
R58S "RES-0402" RES_0402_HIGH 26.5,35.493 r0 top value=1k (schematic designator R58)
R60G "RES-0402" RES_0402_HIGH 48.498,37.798 r90 top value=1k (schematic designator R60)
R60S "RES-0402" RES_0402_HIGH 25.004,35.493 r0 top value=1k (schematic designator R60)
R61G "RES-0402" RES_0402_HIGH 49.297,37.791 r90 top value=1k (schematic designator R61)
R61S "RES-0402" RES_0402_HIGH 24.989,36.306 r0 top value=1k (schematic designator R61)
R62HD "RES-0402" RES_0402_HIGH 52.983,63.066 r270 top value=1k (schematic designator R62)
R62LD "RES-0402" RES_0402_HIGH 51.563,42.681 r270 top value=1k (schematic designator R62)
R63HD "RES-0402" RES_0402_HIGH 51.823,64.276 r180 top value=1k (schematic designator R63)
R63LD "RES-0402" RES_0402_HIGH 50.287,43.58 r180 top value=1k (schematic designator R63)
R64HD "RES-0402" RES_0402_HIGH 51.818,63.476 r180 top value=1k (schematic designator R64)
R64LD "RES-0402" RES_0402_HIGH 50.292,42.672 r180 top value=1k (schematic designator R64)
R66 "RES-0603" RES_0603_MED 59.131,78.867 r270 top value=1k
R67HD "RES-0402" RES_0402_HIGH 51.811,62.665 r180 top value=1k (schematic designator R67)
R67LD "RES-0402" RES_0402_HIGH 50.291,40.883 r180 top value=1k (schematic designator R67)
R68 "RES-0603" RES_0603_MED 57.538,78.809 r270 top value=1k
R69HD "RES-0402" RES_0402_HIGH 51.807,61.89 r180 top value=1k (schematic designator R69)
R69LD "RES-0402" RES_0402_HIGH 50.292,41.783 r180 top value=1k (schematic designator R69)
"Sig V+" "Testpoint" Testpoint-Footprint-1 239.014,7.366 r90 top
Source "Testpoint" Testpoint-Footprint-1 168.656,7.874 r90 top
U1 "AZ1117H-ADJTRE1" SOT-223 58.649,26.252 r180 top
U2 "AZ1117H-ADJTRE1" SOT-223 72.314,80.035 r0 top
U3 "MAX1735EUK50+T" FP-U5-2-IPC_B 73.348,30.711 r90 top
U4 "MAX1735EUK50+T" FP-U5-2-IPC_B 60.909,74.549 r270 top
U5 "MC79L05F-TP" SOT89-150P410X160-3N 93.24,108.18 r0 top
U6 "AZ1117IH-5.0TRG1" SOT230P700X180-4N 53.34,109.22 r90 top
U7 "THS4508RGTT" QFN-16 32.917,30.632 r0 top
U8D "BUF602IDBVT" SOT23-5_HIGH 45.11,75.971 r270 top (schematic designator U8)
U8V "BUF602IDBVT" SOT23-5_HIGH 37.562,76.07 r270 top (schematic designator U8)
U10G "BUF602IDBVT" SOT23-5_HIGH 46.38,37.262 r90 top (schematic designator U10)
U10S "BUF602IDBVT" SOT23-5_HIGH 25.119,33.268 r90 top (schematic designator U10)
U12HD "ADUM4121ARIZ-RL" SOIC-8_WIDE 59.485,63.86 r180 top (schematic designator U12)
U12LD "ADUM4121ARIZ-RL" SOIC-8_WIDE 58.105,43.245 r180 top (schematic designator U12)
Vdd "Testpoint" Testpoint-Footprint-1 304.673,7.874 r0 top
VR1 "RES_POT_JLEAD" TRIM_J-LEAD 64.82,27.95 r0 top value=500
VR2 "RES_POT_JLEAD" TRIM_J-LEAD 66.294,81.661 r180 top value=500
VR3 "RES_POT_JLEAD" TRIM_J-LEAD 78.994,31.75 r0 top value=500
VR4 "RES_POT_JLEAD" TRIM_J-LEAD 56.464,74.447 r180 top value=500

## Footprints (in the part's own frame and the unit in brackets; to place one, negate y for a bottom-side part, rotate by r counter-clockwise, add the part's x,y. Pads: shape width x height; smd on the part's side, far side on the other; paste and mask are expansions set on the pad)
CAP_0402_HIGH [mm] "SMD Capacitor 0402 (1005 Metric) - High Density"
  rect 0.52x0.52 smd: 1(-0.41,0) 2(0.41,0)
  body extent -0.53,-0.28 0.53,0.28, height 0.55
CAP_0603_HIGH [mm] "SMD Capacitor 0603 (1608 Metric) - High Density"
  rect 0.75x0.85 smd: 1(-0.625,0) 2(0.625,0)
  body extent -0.85,-0.45 0.85,0.45, height 0.9
CAP_0805_MED [mm] "SMD Capacitor 0805 (2013 Metric) - Medium Density"
  rect 1x1.45 smd: 1(-0.95,0) 2(0.95,0)
  silkscreen extent -0.9,-0.9 0.9,0.9, body extent -1.35,-0.8 1.35,0.8, height 0.25
CAP_1206_HV [mm] "SMD Capacitor 1206 (3216 Metric) - High Voltage"
  rect 0.45x1.7 smd: 1(-1.575,0) 2(1.575,0)
  silkscreen extent -0.9,-0.75 0.9,0.75, body extent -1.7,-0.9 1.7,0.9, height 1.8
CAP_1812 [mm] "Non Polarized SMD Capacitor 1812 (4532 Metric)"
  rrect50% 1.7x3.8 smd paste+0 mask+0: 1(-2.15,0) 2(2.15,0)
  silkscreen extent -0.85,-1.8 0.85,1.8, body extent -2.25,-1.7 2.25,1.7, height 0.6
CONN_PAD [mm] "Generic Exposed Pad for connecting a Load (30A out)"
  rrect50% 8x4.5 smd paste-2.25: 1(0,0)
DFN_8X8 [mm] "DFN, 4-Leads, Body 8.00x8.00mm, Pitch 7.95mm, IPC Medium Density"
  rect 1.65x1.35 smd: 1(-3.975,3) 2(-3.975,1) 3(-3.975,-1) 4(-3.975,-3) 5(3.975,-3) 6(3.975,-1) 7(3.975,1) 8(3.975,3)
  rect 3.2x7 smd: 9(-0.91,0)
  silkscreen extent -4.05,-4 4,4.45, body extent -4,-4 4,4, height 0.45
DIO_SOD-323F [mm] "SOD-323F Small outline diode"
  rect 0.9x0.8 smd paste+0 mask+0: 1(-1.1,0) 2(1.1,0)
  silkscreen extent -1.8,-0.7 -1.8,0.7, body extent -1.1,-0.9 1.1,0.9, height 0.25
DIO_SOD-923F [mil] "SOD-923F Small outline diode"
  rect 15.5x28 smd paste+0 mask+0: 1(-13.75,0) 2(13.75,0)
  silkscreen extent -31,-10 -31,10, body extent -20,-12 20,12, height 10
FP-C0603C-CF-IPC_B [mm]
  rect 1.007x0.958 smd paste+0 mask+0: 1(-0.726,0) 2(0.726,0)
  silkscreen extent -1.23,-0.88 1.23,0.88, body extent -1.48,-0.73 1.48,0.73, height 0.25
FP-U5-2-IPC_B [mm]
  rect 1.505x0.576 smd paste+0 mask+0: 1(-1.1,0.95)
  rrect100% 1.505x0.576 smd paste+0 mask+0: 2(-1.1,0) 3(-1.1,-0.95) 4(1.1,-0.95) 5(1.1,0.95)
  silkscreen extent -2.48,-1.7 1.4,1.7, body extent -2.1,-1.7 2.1,1.7, height 0.25
J_TERM_BLK_1X2 [mm] "PCB 1X2 Terminal block"
  round 2.5 hole 1.4: 1(-3.175,0) 2(3.175,0)
  silkscreen extent -6.5,-8.4 6.5,4.6, body extent -6.4,-8.3 6.4,4.5, height 21
J_THT_1_PIN [mm] "M/F Pin Header 1 Pin"
  round 1.3 hole 0.8 paste-1000 mask+0: 1(0,0)
  silkscreen extent -1,-1 1,1, body extent -1.02,-1 1.02,1, height 0.25
J_THT_2.54MM_1X2 [mm] "M/F Pin Header 2.54mm pitch, 1X2"
  rect 1.3x1.3 hole 0.8 paste-1000 mask+0: 1(-2.54,0)
  round 1.3 hole 0.8 paste-1000 mask+0: 2(0,0)
  silkscreen extent -3.43,-1.1 0.89,1.1, body extent -3.43,-1.2 1.02,1.2, height 0.25
"Mounting Hole-Footprint-1" [mm]
  round 6 hole 3.6: 1(0,0)
PCAP_2MM_5MM [mm] "Polarized Capacitor THT - 2-Leads, Dia 5mm, Pin Spacing 2mm"
  rect 1.3x1.3 hole 0.8: 1(-1,0)
  round 1.3 hole 0.8: 2(1,0)
  silkscreen extent -2.5,-2.5 2.5,2.5, body extent -2.5,-2.5 2.45,2.5, height 12
QFN-16 [mm] "QFN-16  3mmX3mm"
  rrect25% 0.86x0.26 smd paste-0.032 mask+0.1: 1(-1.45,0.75) 2(-1.45,0.25) 3(-1.45,-0.25) 4(-1.45,-0.75) 9(1.45,-0.75) 10(1.45,-0.25) 11(1.45,0.25) 12(1.45,0.75)
  rrect25% 0.26x0.86 smd paste-0.032 mask+0.1: 5(-0.75,-1.45) 6(-0.25,-1.45) 7(0.25,-1.45) 8(0.75,-1.45) 13(0.75,1.45) 14(0.25,1.45) 15(-0.25,1.45) 16(-0.75,1.45)
  rect 1.6x1.6 smd paste-2 mask+0.1: 17(0,0)
  round 0.5 hole 0.35 mask+0.102: 18(-0.508,0.508) 19(0.508,0.508) 20(0.508,-0.508) 21(-0.508,-0.508)
  silkscreen extent -1.82,-1.5 1.5,1.82, body extent -1.5,-1.5 1.5,1.5, height 2
RES_0402_HIGH [mm] "SMD Resistor 0402 (1005 Metric) - High Density"
  rect 0.45x0.45 smd: 1(-0.4,0) 2(0.4,0)
  body extent -0.53,-0.28 0.53,0.28, height 0.4
RES_0603_MED [mm] "SMD Resistor 0603 (1608 Metric) - Medium Density"
  rect 0.95x0.95 smd: 1(-0.75,0) 2(0.75,0)
  body extent -0.87,-0.48 0.87,0.48, height 0.55
RES_1206_MED [mm] "SMD Resistor 1206 (3216 Metric) - Medium Density"
  rect 1.15x1.75 smd: 1(-1.425,0) 2(1.425,0)
  silkscreen extent -0.45,-0.78 0.45,0.78, body extent -1.65,-0.87 1.65,0.87, height 0.6
RES_2512_MED [mm] "SMD Resistor 2512 (6432 Metric) - Medium Density"
  rect 1.25x3.4 smd: 1(-3.05,0) 2(3.05,0)
  silkscreen extent -1,-1.7 1,1.7, body extent -3.05,-1.7 3.05,1.7, height 0.25
RES_2512_SIDE [mm] "SMD Resistor 2512 (6432 Metric) - On its side"
  rect 1x1 smd: 1(-2.85,0) 2(2.85,0)
  silkscreen extent -3,-0.7 3,0.7, body extent -3.05,-0.7 3.05,0.7, height 0.25
SMA_VERT_F [mil] "SMA Vertical Connector, Female"
  round 79 hole 59: 1(0,0)
  round 75 hole 59.06 mask+0: 2(-100.5,100.5) 3(100.5,100.5) 4(-100.5,-100.5) 5(100.5,-100.5)
  silkscreen extent -143,-143 143,143, body extent 0,0 10,10, height 10
SOIC-8_WIDE [mm] "SOIC-8 Wide body"
  rect 1.655x0.582 smd paste+0 mask+0: 1(-4.781,1.905)
  rrect100% 1.655x0.582 smd paste+0 mask+0: 2(-4.781,0.635) 3(-4.781,-0.635) 4(-4.781,-1.905) 5(4.781,-1.905) 6(4.781,-0.635) 7(4.781,0.635) 8(4.781,1.905)
  silkscreen extent -6.23,-2.93 3.45,2.93, body extent -4.83,-3.18 4.83,3.18, height 0.25
SOT23-5_HIGH [mm] "SOT23, 5-Leads, Body 3.10x1.80mm, Pitch 0.95mm, IPC High Density"
  rect 0.85x0.55 smd: 1(-1.325,0.95) 2(-1.325,0) 3(-1.325,-0.95) 4(1.325,-0.95) 5(1.325,0.95)
  silkscreen extent -1.45,-1.55 0.5,1.9, body extent -1.7,-1.55 1.7,1.55, height 1.45
SOT89-150P410X160-3N [mm] "SOT89, 3-Leads, Body 4.50x2.45mm, Pitch 1.50mm, Lead Span 4.1mm, IPC Medium Density"
  rect 1.4x0.6 smd: 1(-1.8,1.5) 3(-1.8,-1.5)
  rect 1.8x0.6 smd: 2(-1.6,0)
  Top Layer region: -0.7,0.3 -0.05,0.95 1.85,0.95 2.5,0.3 2.5,-0.3 1.85,-0.95 -0.05,-0.95 -0.7,-0.3
  silkscreen extent -2.1,-2.35 1.38,2.47, body extent -1.3,-2.35 1.35,2.35, height 1.6
SOT230P700X180-4N [mm] "SOT223, 4-Leads, Body 6.50x7.00mm (avg), Pitch 2.30mm, IPC Medium Density"
  rect 2.15x1 smd: 1(-2.925,2.3) 2(-2.925,0) 3(-2.925,-2.3)
  rect 2.15x3.25 smd: 4(2.925,0)
  silkscreen extent -3.05,-3.35 1.55,3.47, body extent -1.85,-3.35 1.85,3.35, height 1.8
SOT-223 [mm] "SOT-223"
  rect 1.2x1.6 smd: 1(-2.3,-3.2) 2(0,-3.2) 3(2.3,-3.2)
  rect 3.3x1.6 smd: 4(0,3.2)
  silkscreen extent -3.94,-1.7 3.3,1.8, body extent -3.43,-3.3 3.56,3.18, height 0.25
Testpoint-Footprint-1 [mm]
  round 1.3 smd: 1(0,0)
TRIM_J-LEAD [mm] "3mm SMD J-Lead Trim Pot"
  rect 1.2x1.2 smd: 1(-1,-1.8) 2(1,-1.8)
  rect 1.524x1.524 smd: 3(0,1.5)
  silkscreen extent -2,-2.7 2,2.5, body extent -1.9,-2.6 1.9,1.9, height 5

## Part data
+5V -5V "H +V" "H -V" H_Gate H_SS HSig "L +V" "L -V" L_Gate L_SS LSig nHSig nLSig "Sig V+" Source Vdd: library part CMP-001-0000-5, "testpoint for circuit"
C1 C2 C3 C4 C5 C6 C7 C8 C9 C10: library part CMP-001-00088-2, "Non polarized SMD capacitor - 1812 (4532 Metric)", Package=1812
C11 C12 C13 C14 C15 C16 C17 C18 C20 C21 C22 C23 C24 C25 C26 C27 C28 C29 C30 C31 C32 C33 C37 C38 C39 C40 C43 C44 C45 C46 C49 C50 C51: library part CMP-001-00086-3, "Non polarized SMD capacitor - 0805 (1608 Metric)", Package=0805
C19 C34: library part CMP-001-00089-1, "Non polarized SMD capacitor - 1206 (3216 Metric) High Voltage", Package=1206, Voltage Rating=1kV
C35 C36 C41 C42: library part CMP-001-00091-1, "Polarized THT capacitor - Radial can, 2mm lead spacing, 5mm diameter"
C47 C48 C52 C53: library part CMP-2006-03061-2, "CAP CER 0.1UF 50V X7R 0603", Capacitance="0.10 μF", Manufacturer=KEMET, Package=C0603C-CF, Temperature="-55°C to +125°C", Temperature Characteristic=X7R, Temperature Coefficient=30ppm/°C, Temperature Range High=+125°C, Temperature Range Low=-55°C, Tolerance=0.1, Voltage Rating="50 V", Automotive=Yes, Automotive Grade="Grade 1", Category=Cap, ComponentLink2Description=Datasheet, ComponentLink2URL=https://api.kemet.com/component-edge/download/datasheet/C0603C100J5GACAUTO.pdf, Device Class L1="Passive Components", Device Class L2=Capacitors, Device Class L3="Ceramic Capacitors", Digikey Description="CAP CER 0.1UF 50V X7R 0603", Height=0.87mm, Lead Free=Yes, Manufacturer Part Number=C0603C104K5RACTU, Material=Ceramic, Octopart=https://octopart.com/c0603c104k5ractu-kemet-139244, RoHS=TRUE
C56 C57 C58 C71D C71V C72D C72V C75D C75V C80D C80V C85G C85S C86G C86S C90G C90S C94G C94S C96HD C96LD C97HD C97LD C98HD C98LD C99HD C99LD C100HD C100LD C101HD C101LD C102HD C102LD C103HD C103LD C104HD C104LD: library part CMP-001-00084-2, "Non polarized SMD capacitor - 0603 (1608 Metric)", Package=0603
C59 C60 C61 C62 C66 C70D C70V C74D C74V C76D C76V C84G C84S C88G C88S C89G C89S: library part CMP-001-00083-3, "Non polarized SMD capacitor - 0402 (1005 Metric)", Package=0402
D1HD D1LD: library part CMP-004-00031-2, "Low VF SMD Schottky Barrier Diode", Package=SOD-923F
D2HD D2LD D3HD D3LD: library part CMP-004-00032-1, "Generic SOD-323F Zener diode", Package=SOD-323F
FB1HD FB1LD R1 R3 R5 R8 R9 R11 R12 R15 R16 R18 R19 R20 R21 R24 R26 R27 R28 R29 R30 R31 R32 R33 R34 R35 R36 R37 R38 R39 R40 R41 R42 R43 R44 R46D R46V R47D R47V R51D R51V R52D R52V R53G R53S R55G R55S R57G R57S R58G R58S R60G R60S R61G R61S R62HD R62LD R63HD R63LD R64HD R64LD R67HD R67LD R69HD R69LD: library part CMP-009-00177-2, "SMD Resistor - 0402 (1005 Metric)", Package=0402
G1 G2: library part CMP-023-000000-5, "650V 15A GaN Enhancement mode Transistor", Package=DFN8X8
J1 J3: library part CMP-002-00071-1, "Terminal Block 1X2, 6.35mm pitch"
J2 J6 J18: library part CMP-002-00074-4, "Solderable Connection Pad"
J4 J14: library part CMP-002-00073-2, "Male Pin 2.54mm pitch 1X2"
J5 J7 J8 J9 J10 J11 J12 J13 J15 J16 J17 J19 J20 J21: library part CMP-002-00072-1, "Male Pin, 1 Pin"
J22 J23 J24D J24V J26G J26S: library part CMP-025-000000-6, "SMA connector, Vertical, Female", Package=SMA
MH1 MH2 MH3 MH4 MH5 MH6: library part CMP-032-000006-1
R2: library part CMP-009-00182-3, "SMD Resistor - 2512 (6432 Metric)", Package=2512
R4 R10 R17 R22: library part CMP-009-00180-2, "SMD Resistor - 1206 (3216 Metric)", Package=1206
R6 R7 R13 R14 R66 R68: library part CMP-009-00178-2, "SMD Resistor - 0603 (1608 Metric)", Package=0603
R48D R48V: library part CMP-009-00183-1, "SMD Resistor - 2512 (6432) On It's Side", Package=2512
U1 U2: library part CMP-019-00050-1, "IC REG LINEAR POS ADJ 1A SOT223", Package=SOT223
U3 U4: library part CMP-05721-000044-1, "IC REG LIN NEG ADJ 200MA SOT23-5"
U5: library part CMP-032-000004-1, "https://www.digikey.ca/en/products/detail/micro-commercial-co/MC79L05F-TP/804677"
U6: library part CMP-032-000005-2, "https://www.digikey.ca/en/products/detail/diodes-incorporated/AZ1117IH-5-0TRG1/5699673"
U7: library part CMP-027-000000-11, "WIDEBAND, LOW NOISE, LOW DISTORTION FULLY DIFFERENTIAL AMPLIFIER", Package=QFN3X3
U8D U8V U10G U10S: library part CMP-015-000000-5, "1000MHz,Wide Bandwidth, High-Speed, Closed Loop Buffer 5-SOT-23 -45 to 85", Package=SOT-23-5, Design Item ID=BUF602IDBVT, MF="Texas Instruments"
U12HD U12LD: library part CMP-019-000000-4, "DGTL ISO 5KV 1CH GATE DRVR 8SOIC", Package="8-SOIC WIDE"
VR1 VR2 VR3 VR4: library part CMP-009-00181-2, "Potentiometer, J-Lead Trim Pot"

## Via types
v1: diameter 0.5, hole 0.3, Top Layer to Bottom Layer, 330 vias

## Nets (pads, with @x,y where several pads share a name; then routed paths per layer and width w, separated by ;. In a path a pad name is that pad's centre, name@x,y a point inside that pad or via, vN(x,y) a via of type N, cw(c..) or ccw(c..) an arc to the next point about the centre after c; other vN are vias at no path point)
+5: +5V.1 C35.1 C53.1 C56.2 C57.2 C58.2 C70D.1 C70V.1 C71D.1 C71V.1 C72D.1 C72V.1 C84G.1 C84S.1 C85G.1 C85S.1 C86G.1 C86S.1 U6.2 U6.4 U7.5 U7.6 U7.7 U7.8 U7.12 U8D.5 U8V.5 U10G.5 U10S.5 | length 13.4
  Top Layer w0.25: v1@34.517,31.932 v1(34.617,32.032)
  Top Layer w0.254: U10G.5@45.364,38.612 U10G.5@45.389,38.587
  Top Layer w0.3: U7.12@34.367,31.382 34.367,31.782 v1@34.517,31.932
  Top Layer w0.508: C84G.1@45.144,39.431 45.409,39.166 U10G.5@45.409,38.612
  Top Layer w0.635: C84S.1@23.052,33.58 C86S.1@23.052,34.536 ; C70D.1@46.003,73.635 46.003,74.621 46.028,74.646 U8D.5@46.06,74.646 46.16,74.646 46.394,74.88 47.305,74.88 C71D.1@47.33,74.905 C72D.1@47.33,73.73
  Top Layer w0.8: C85S.1@22.883,35.864 22.883,34.706 C86S.1@22.971,34.618 ; C86S.1@23.052,34.536 C86S.1@22.971,34.618 ; U10S.5@24.169,34.593 24.144,34.618 C86S.1@22.971,34.618 ; U8V.5@38.512,74.745 38.583,74.745 38.608,74.72 38.608,74.041 ; U8V.5@38.608,74.77 39.737,74.77 39.837,74.87 ; C86G.1@44.131,39.717 44.12,39.706 44.12,38.587 44.115,38.582 45.384,38.582 U10G.5@45.389,38.587
  other v1: 31.717,27.832 34.117,27.832 32.317,28.132 33.517,28.132
+5_SIG: "Sig V+.1" C20.1 C21.1 C100HD.1 C100LD.1 J5.1 R3.2 R9.2 R16.2 R20.2 U12HD.1 U12LD.1 | length 11.1
  Top Layer w0.185: U12HD.1@64.265,61.955 64.265,61.358 64.78,60.843 66.477,60.843 C100HD.1@66.5,60.866 ; v1(67.818,41.021) R16.2@67.818,41.764 ; v1(67.818,45.339) 67.834,45.323 67.834,44.578 R20.2@67.85,44.562 ; C20.1@68.58,52.39 C21.1@70.866,52.39 ; v1(69.977,61.722) 70.011,61.756 70.011,62.395 R3.2@70.044,62.428 ; v1(69.977,66.04) 70.011,66.006 70.011,65.361 R9.2@70.044,65.328
  Top Layer w0.762: U12LD.1@62.886,41.34 63.422,41.34 64.392,40.371 C100LD.1@65.202,40.371
  other v1: 64.135,40.132 62.484,40.513 63.373,40.513 68.199,51.308 69.088,51.308 70.358,51.308 71.247,51.308 65.532,60.706 63.881,61.087 64.77,61.087
+VIN: C41.1 C45.1 C46.1 C52.2 J10.1 U6.3
-5: -5V.1 C36.1 C47.2 C74D.1 C74V.1 C75D.1 C75V.1 C80D.1 C80V.1 C88G.1 C88S.1 C90G.1 C90S.1 C94G.1 C94S.1 U5.3 U8D.2 U8V.2 U10G.2 U10S.2 | length 13.4
  Top Layer w0.635: C88S.1@24.348,30.746 24.896,30.746 24.96,30.682 25.43,30.682 25.455,30.657 25.46,30.661 26.676,30.661 C90S.1@26.68,30.665 ; U10S.2@25.119,31.943 25.169,31.943 25.194,31.918 C94S.1@25.194,30.918 ; C80V.1@36.601,78.42 36.659,78.362 37.659,78.362 C74V.1@37.662,78.36 37.637,78.335 37.637,77.42 37.612,77.395 U8V.2@37.562,77.395 ; C80D.1@42.799,78.42 C75D.1@43.993,78.42 44.05,78.362 45.027,78.362 45.078,78.312 45.078,77.329 U8D.2@45.11,77.296
  Top Layer w0.8: C75V.1@35.331,78.42 C80V.1@36.601,78.42 ; C94G.1@46.238,32.766 C90G.1@46.238,33.909 46.263,33.934 46.263,34.894 46.33,34.962 46.33,35.912 46.355,35.937 U10G.2@46.38,35.937
-VIN: C42.2 C48.1 C51.2 J21.1 U5.2
GND_SIG: C20.2 C21.2 C100HD.2 C100LD.2 J7.1 R1.1 R12.1 R15.1 R24.1 U12HD.4 U12LD.4 | length 4.9
  Top Layer w0.185: C100HD.2@66.5,62.116 C100HD.2@66.513,62.103 ; v1(69.342,41.021) R15.1@69.342,41.764 ; v1(69.342,45.339) 69.346,45.335 69.346,44.566 R24.1@69.35,44.562 ; v1(71.501,61.722) 71.522,61.743 71.522,62.406 R1.1@71.544,62.428 ; R12.1@71.544,65.328 71.586,65.37 71.586,65.998 v1(71.628,66.04)
  Top Layer w0.762: C100LD.2@65.202,41.621 65.293,41.529 v1(66.167,41.529) ; C100HD.2@66.513,62.103 v1(67.437,62.103)
  other v1: 64.262,45.212 62.484,45.974 63.373,45.974 68.199,55.372 69.215,55.372 70.358,55.372 71.247,55.372 65.659,65.659 64.015,66.432 64.908,66.442
H_+V: "H +V.1" C17.1 C18.1 C37.1 C38.1 C96HD.2 C97HD.2 C98HD.2 C99HD.2 U2.2 U2.4 U12HD.8 VR2.1 | length 10.3
  Top Layer w0.185: C96HD.2@52.937,60.046 52.941,60.05 54.091,60.05 C97HD.2@54.102,60.061 54.113,60.05 54.356,60.05 C98HD.2@55.228,60.05 ; U12HD.8@54.704,61.955 54.751,62.002 U12HD.8@55.301,62.002 ; U12HD.8@55.254,61.955 U12HD.8@55.348,61.955 ; U12HD.8@55.436,61.956 55.619,61.772 55.619,60.188 55.365,60.188 C98HD.2@55.228,60.05 ; C99HD.2@56.384,60.041 56.374,60.05 C98HD.2@55.228,60.05 ; C37.1@71.801,85.154 71.576,85.154 71.168,84.747 71.168,83.497 70.906,83.235 U2.4@72.314,83.235
H_+VIN: C13.1 C14.1 C44.1 J9.1 U2.3 | length 18.4
  Top Layer w1.27: U2.3@74.614,76.835 74.894,76.556 C44.1@77.155,76.556 C14.1@77.155,78.537 C13.1@77.155,80.493 76.962,80.686 76.962,84.201 78.707,85.946 J9.1@84.254,85.946
H_-V: "H -V.1" C32.1 C33.1 C39.1 C40.1 C101HD.1 C102HD.1 C103HD.1 C104HD.1 U4.5 U12HD.5 VR4.2 VR4.3
H_-VIN: C30.1 C31.1 C50.2 J20.1 R66.1 U4.2 | length 39.4
  Top Layer w0.2: C31.1@60.645,82.677 C31.1@60.96,82.992
  Top Layer w0.3: R66.1@59.131,79.617 60.897,79.617 60.909,79.629 ; C31.1@60.645,82.677 60.909,82.413 60.909,80.909 C30.1@60.645,80.645 60.909,80.381 60.909,79.629 ; U4.2@60.909,75.649 60.909,78.349 C50.2@60.645,78.613 60.909,78.877 60.909,79.629
  Top Layer w1.27: C31.1@60.645,82.677 60.645,86.934 64.897,91.186 J20.1@84.201,91.186